# EAGLE board biofeedback (EAGLE 6.0), part 1 of 2
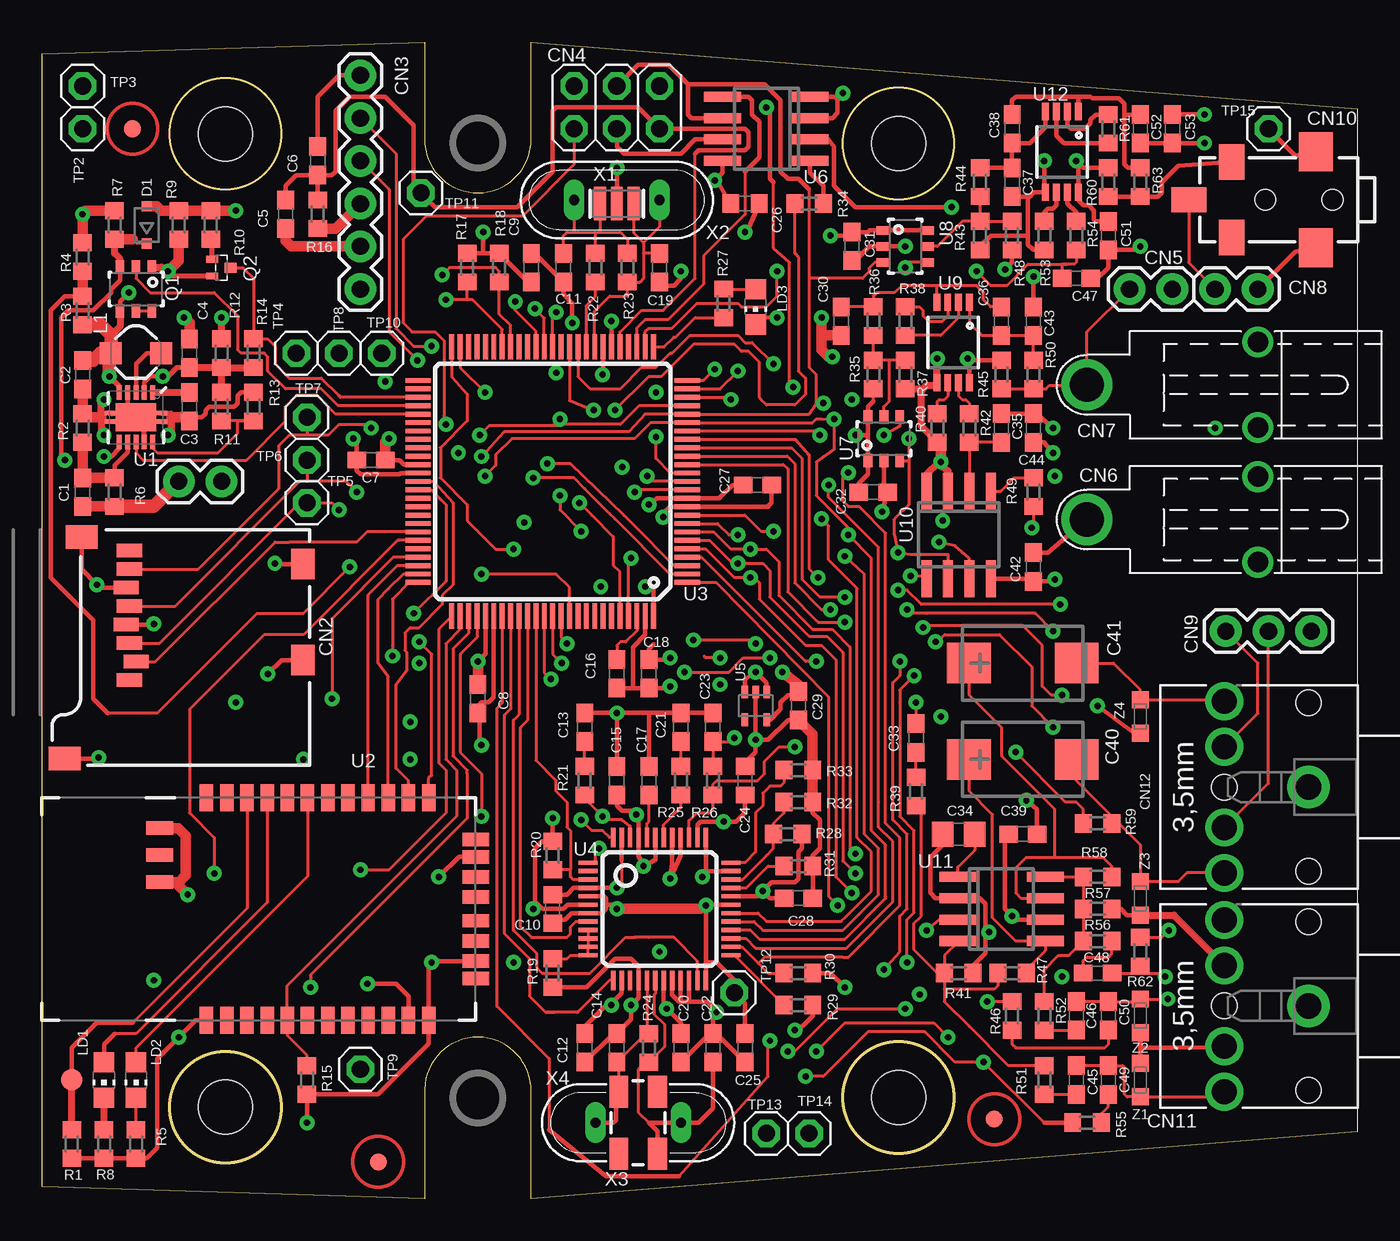
[diagram p0: board, top side]
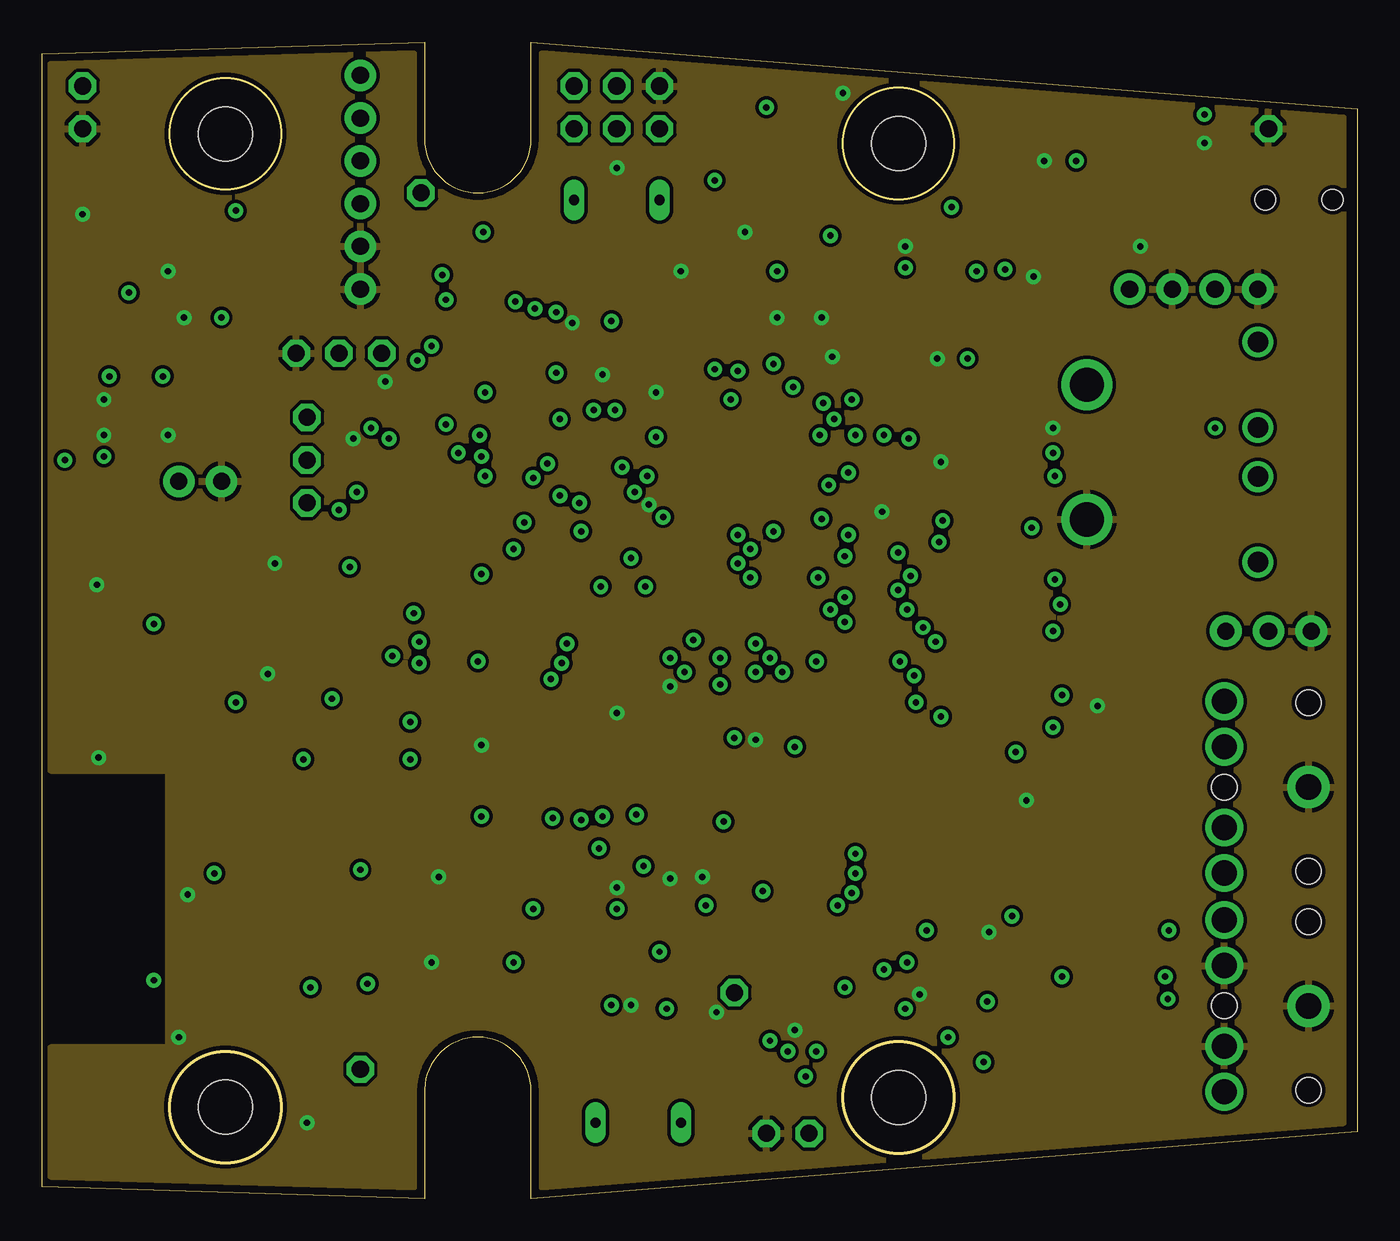
[diagram p1: board, inner layer GND]
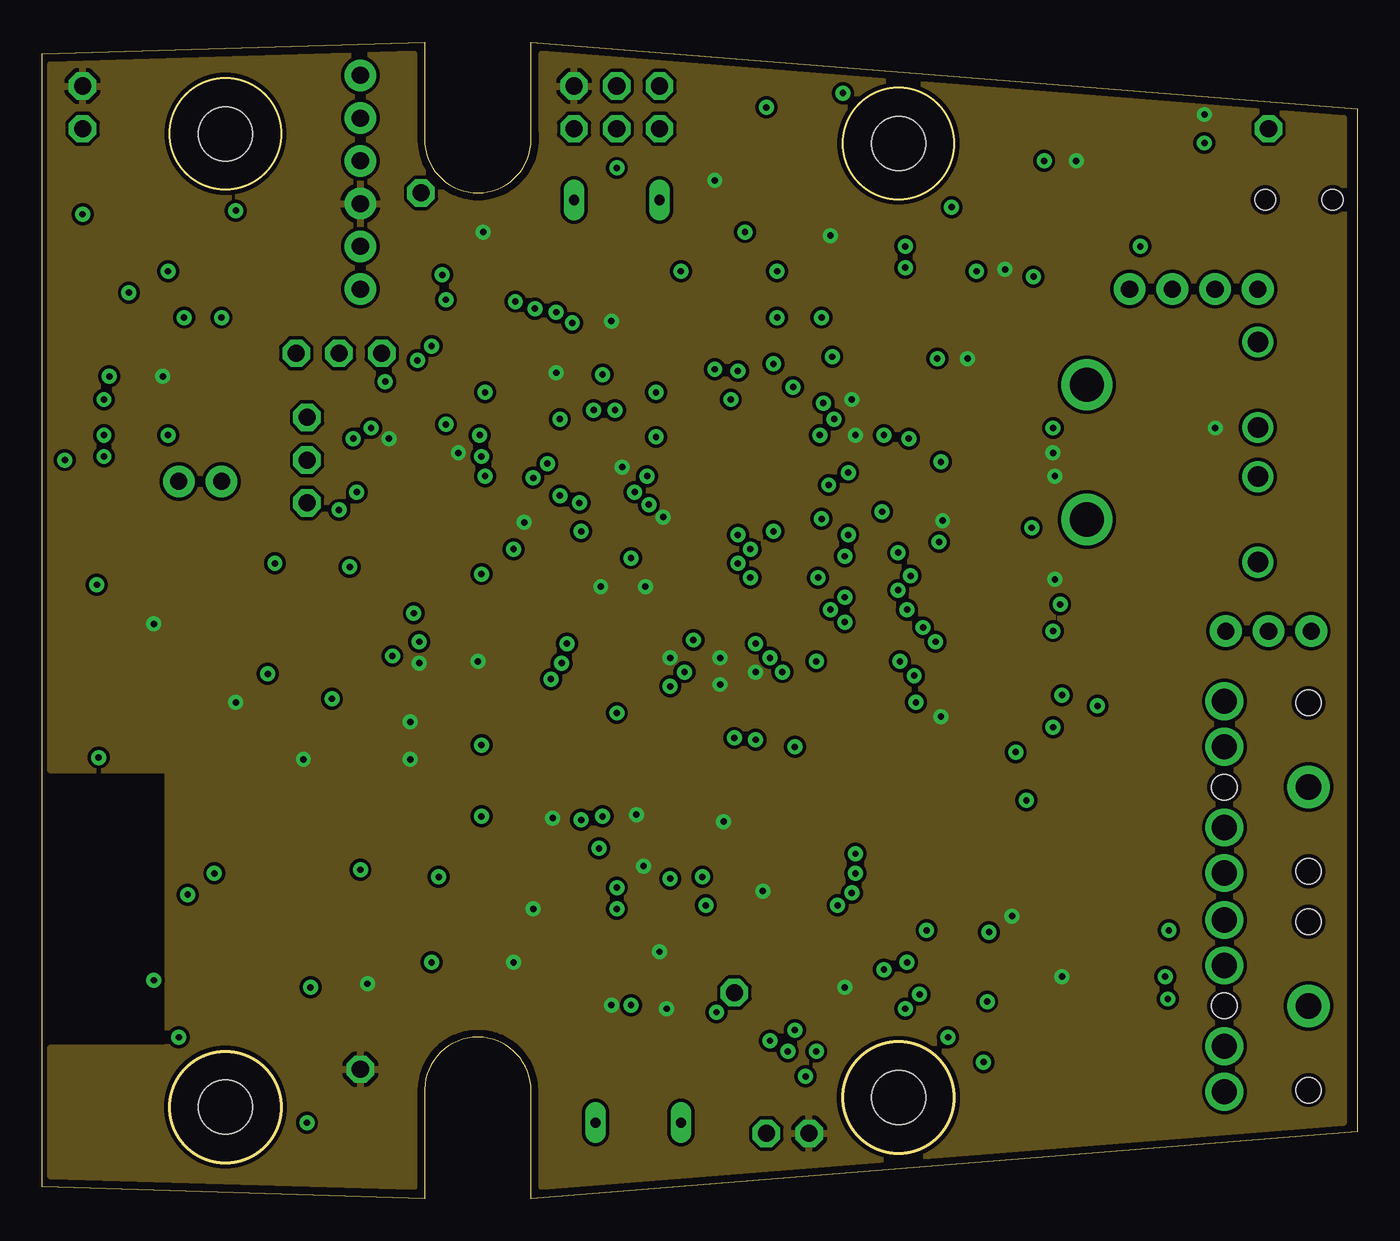
[diagram p2: board, inner layer VCC]
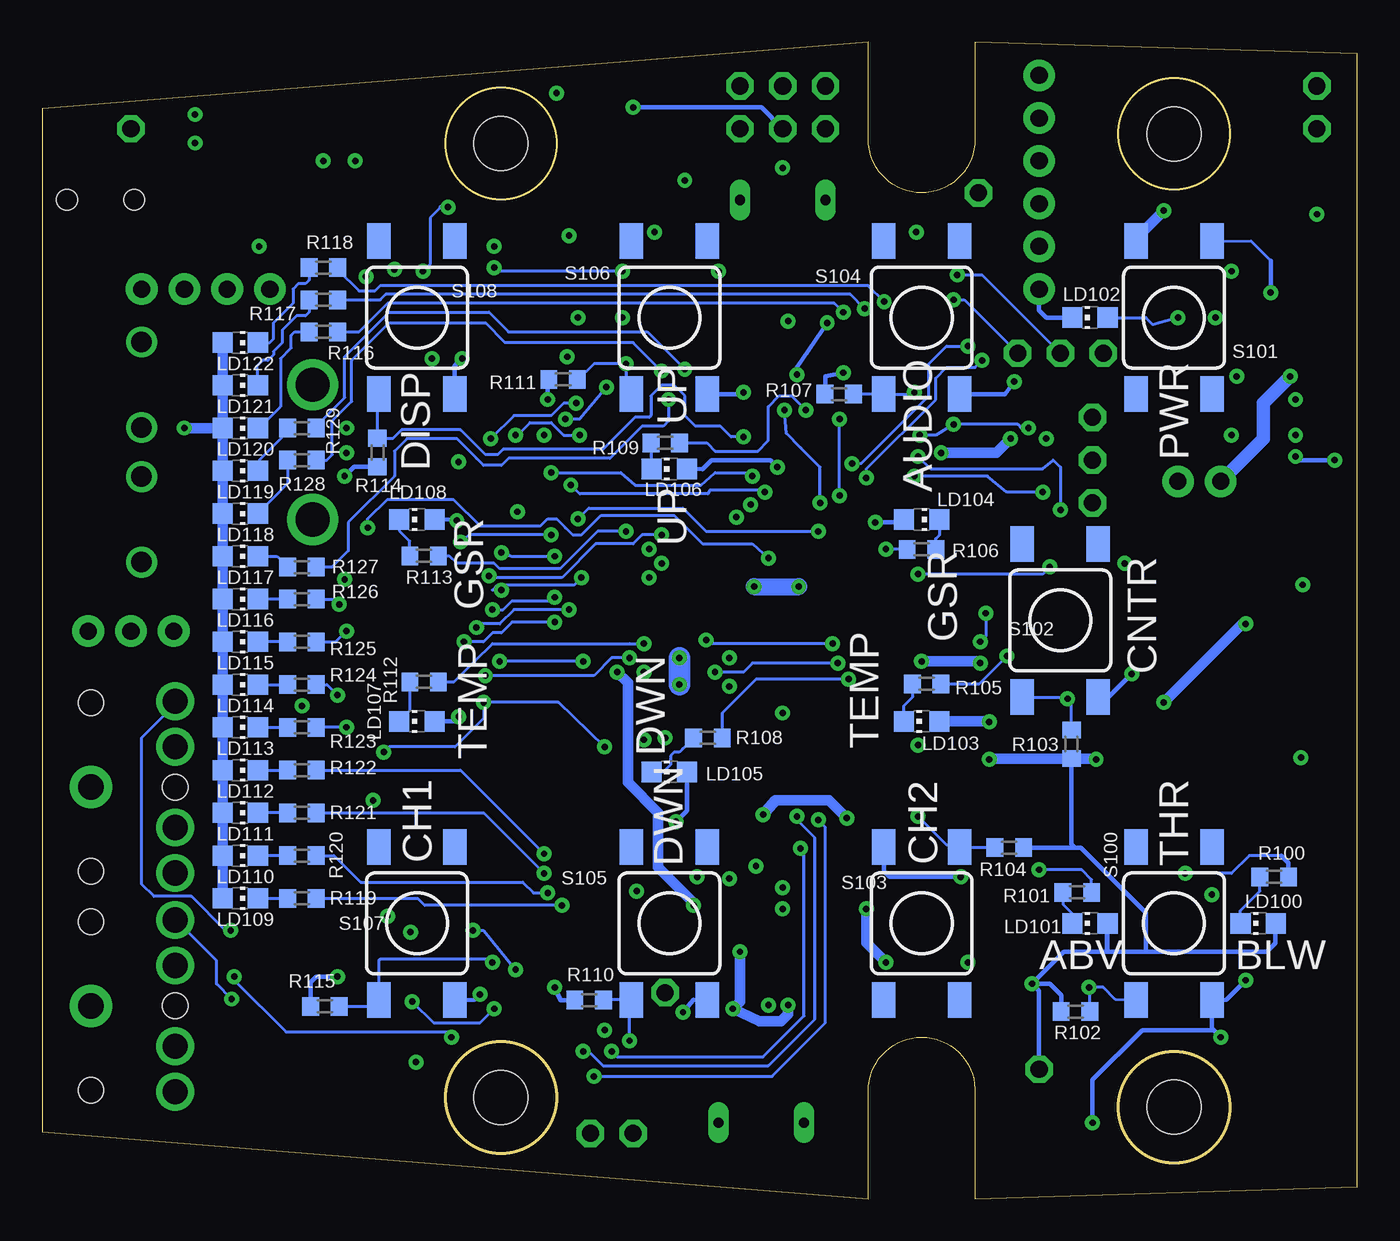
[diagram p3: board, bottom side, seen from below]

Size 78.18 x 68.73 mm. Coordinates in mm from the lower left corner, seen from the top.
Outline: 0,68.02 22.73,68.73 22.73,62.95 arc90 25.91,59.77 arc90 29.06,62.95 29.06,68.73 78.18,64.75 78.18,3.97 29.06,0 29.06,6.43 arc90 25.91,9.61 arc94 22.73,6.22 22.73,0 0,0.71 0,68.02
Outline: circle at 10.9,5.45 radius 3.3
Outline: circle at 50.9,6.03 radius 3.3
Outline: circle at 10.9,63.28 radius 3.3
Outline: circle at 50.9,62.71 radius 3.3
Copper layers (1+2*15+16): Top 0.035mm / dielectric 0.2mm / GND 0.035mm / dielectric 0.15mm / VCC 0.035mm / dielectric 0.2mm / Bottom 0.035mm
Design rules: minimum track width 7mil, minimum drill 15mil, track to track 8mil, track to pad 7mil, pad to pad 8mil, via to via 8mil, smd to smd 8mil, copper to edge 10mil, drill to drill 8mil, minimum pad ring 12mil, minimum via ring 10mil, stop-mask expansion 3mil, vias tented up to drill 25mil, thermal gap 10mil
Net classes: 0 default: width 0.178 mm; 1 power: width 0.254 mm; 2 VIN: width 0.406 mm; 3 3.3V: width 0.254 mm; 4 1.8V: width 0.254 mm
Holes 3.2 mm at 50.9,62.71 10.9,63.28 50.9,6.03 10.9,5.45

## Footprints (pad centres in the part's own frame; a part is rotated, then mirrored left to right if it is on the bottom)
C0603 = smd 1.1 x 1: 1 -0.85,0; 2 0.85,0
C0603' = smd 1 x 1.1: 1 -0.85,0; 2 0.85,0
C0805 = smd 1.3 x 1.5: 1 -0.95,0; 2 0.95,0
CT7343 = smd 2.6 x 2.4: + -3.2,0; - 3.2,0
1X02 = drill 1.016 pad 1.88: 1 0,0; 2 2.54,0
MICRO-SD-SOCKET-PP = smd 0.8 x 1.5: 1 -8.94,10.7; 2 -7.84,10.3; 3 -6.74,10.7; 4 -5.64,10.9; 5 -4.54,10.7; 6 -3.44,10.9; 7 -2.34,10.7; 8 -1.24,10.7 | smd 1.8 x 1.4: CD1 -2.05,0.4; CD2 -7.75,0.4 | smd 1.4 x 1.9: GND1 -13.6,14.55; GND3 -0.45,13.55
1X06 = drill 1.016 pad 1.88: 1 0,0; 2 2.54,0; 3 5.08,0; 4 7.62,0; 5 10.16,0; 6 12.7,0
2X03 = drill 1.016 octagon: 1 -2.54,-1.27; 2 -2.54,1.27; 3 0,-1.27; 4 0,1.27; 5 2.54,-1.27; 6 2.54,1.27
TOUCHPROOF1.1MM = drill 2.032: P$1 -10.16,0 | drill 1.219: P$2 0,2.54; P$3 0,-2.54
1X03 = drill 1.016 pad 1.88: 1 0,0; 2 2.54,0; 3 5.08,0
STEREOJACK2.5MM_SMD = smd 1.5 x 2.1: 1 6,2.25; 4 6,-2.25 | smd 2.1 x 1.5: 3 8.55,0 | smd 2 x 2.3: 5 1,2.85; A 1,-2.85 | hole 1.219: 0,0; 4,0
STX3100 = drill 1.5 pad 2.54: 1 2.7,-0.1 | drill 1.5: 2 7.7,5; 3 7.7,2.3; 4 7.7,-2.5; 5 7.7,-5.2 | hole 1.5: 2.7,4.9; 2.7,-5.1; 7.7,-0.1
SOD323-R = smd 0.6 x 0.6: A 1.1,0; C -1.1,0
CDRH2D09 = smd 1.3 x 1.3: P$1 -1.5,0; P$2 1.5,0
CHIP-LED0805 = smd 1.2 x 1.2: A 0,-1.05; C 0,1.05
FIDUCIA-MOUNT = smd 1.016 x 1.016: P$1 0,0
SOT-23-6 = smd 0.51 x 0.8: 1 -0.95,-1.3; 2 0,-1.3; 3 0.95,-1.3; 4 0.95,1.3; 5 0,1.3; 6 -0.95,1.3
EMT3 = smd 0.4 x 0.7: B -0.5,-0.55; E 0.5,-0.55 | smd 0.6 x 0.7: C 0,0.55
R0603 = smd 1 x 1.1: 1 -0.85,0; 2 0.85,0
TACTILE_SWITCH_SMD_6MM_SQ = smd 2.1 x 1.4: 1 -4.55,2.25; 2 4.55,2.25; 3 -4.55,-2.25; 4 4.55,-2.25
PAD.03X.05 = smd 1.27 x 1.27: P$1 0,0
1X01 = drill 1.016 octagon: 1 0,0
QFN-10_PAD = smd 0.297 x 0.85: 1 -1,-1.475; 2 -0.5,-1.475; 3 0,-1.475; 4 0.5,-1.475; 5 1,-1.475; 6 1,1.475; 7 0.5,1.475; 8 0,1.475; 9 -0.5,1.475; 10 -1,1.475 | smd 0.7 x 0.28: 11 -1.5,0.25; 12 -1.5,-0.25; 13 1.5,0.25; 14 1.5,-0.25 | smd 2.4 x 1.65: 15 0,0
RN41 = smd 0.8 x 1.6: 1 -6.6,-6.6; 2 -5.4,-6.6; 3 -4.2,-6.6; 4 -3,-6.6; 5 -1.8,-6.6; 6 -0.6,-6.6; 7 0.6,-6.6; 8 1.8,-6.6; 9 3,-6.6; 10 4.2,-6.6; 11 5.4,-6.6; 12 6.6,-6.6; 13 6.6,6.6; 14 5.4,6.6; 15 4.2,6.6; 16 3,6.6; 17 1.8,6.6; 18 0.6,6.6; 19 -0.6,6.6; 20 -1.8,6.6; 21 -3,6.6; 22 -4.2,6.6; 23 -5.4,6.6; 24 -6.6,6.6 | smd 1.6 x 0.8: 25 -9.4,4.8; 26 -9.4,3.2; 27 -9.4,1.6; 28 9.4,3.1; 29 9.4,-3.1; 30 9.4,-4.122; 31 9.4,-1.9; 32 9.4,-0.7; 33 9.4,0.7; 34 9.4,1.9; 35 9.4,4.122
TQFP100 = smd 1.5 x 0.29: 1 -8,6; 2 -8,5.5; 3 -8,5; 4 -8,4.5; 5 -8,4; 6 -8,3.5; 7 -8,3; 8 -8,2.5; 9 -8,2; 10 -8,1.5; 11 -8,1; 12 -8,0.5; 13 -8,0; 14 -8,-0.5; 15 -8,-1; 16 -8,-1.5; 17 -8,-2; 18 -8,-2.5; 19 -8,-3; 20 -8,-3.5; 21 -8,-4; 22 -8,-4.5; 23 -8,-5; 24 -8,-5.5; 25 -8,-6; 51 8,-6; 52 8,-5.5; 53 8,-5; 54 8,-4.5; 55 8,-4; 56 8,-3.5; 57 8,-3; 58 8,-2.5; 59 8,-2; 60 8,-1.5; 61 8,-1; 62 8,-0.5; 63 8,0; 64 8,0.5; 65 8,1; 66 8,1.5; 67 8,2; 68 8,2.5; 69 8,3; 70 8,3.5; 71 8,4; 72 8,4.5; 73 8,5; 74 8,5.5; 75 8,6 | smd 0.29 x 1.5: 26 -6,-8; 27 -5.5,-8; 28 -5,-8; 29 -4.5,-8; 30 -4,-8; 31 -3.5,-8; 32 -3,-8; 33 -2.5,-8; 34 -2,-8; 35 -1.5,-8; 36 -1,-8; 37 -0.5,-8; 38 0,-8; 39 0.5,-8; 40 1,-8; 41 1.5,-8; 42 2,-8; 43 2.5,-8; 44 3,-8; 45 3.5,-8; 46 4,-8; 47 4.5,-8; 48 5,-8; 49 5.5,-8; 50 6,-8; 76 6,8; 77 5.5,8; 78 5,8; 79 4.5,8; 80 4,8; 81 3.5,8; 82 3,8; 83 2.5,8; 84 2,8; 85 1.5,8; 86 1,8; 87 0.5,8; 88 0,8; 89 -0.5,8; 90 -1,8; 91 -1.5,8; 92 -2,8; 93 -2.5,8; 94 -3,8; 95 -3.5,8; 96 -4,8; 97 -4.5,8; 98 -5,8; 99 -5.5,8; 100 -6,8
LQFP-48 = smd 0.254 x 1.143: 1 -2.75,-4.25; 2 -2.25,-4.25; 3 -1.75,-4.25; 4 -1.25,-4.25; 5 -0.75,-4.25; 6 -0.25,-4.25; 7 0.25,-4.25; 8 0.75,-4.25; 9 1.25,-4.25; 10 1.75,-4.25; 11 2.25,-4.25; 12 2.75,-4.25; 25 2.75,4.25; 26 2.25,4.25; 27 1.75,4.25; 28 1.25,4.25; 29 0.75,4.25; 30 0.25,4.25; 31 -0.25,4.25; 32 -0.75,4.25; 33 -1.25,4.25; 34 -1.75,4.25; 35 -2.25,4.25; 36 -2.75,4.25 | smd 1.143 x 0.254: 13 4.25,-2.75; 14 4.25,-2.25; 15 4.25,-1.75; 16 4.25,-1.25; 17 4.25,-0.75; 18 4.25,-0.25; 19 4.25,0.25; 20 4.25,0.75; 21 4.25,1.25; 22 4.25,1.75; 23 4.25,2.25; 24 4.25,2.75; 37 -4.25,2.75; 38 -4.25,2.25; 39 -4.25,1.75; 40 -4.25,1.25; 41 -4.25,0.75; 42 -4.25,0.25; 43 -4.25,-0.25; 44 -4.25,-0.75; 45 -4.25,-1.25; 46 -4.25,-1.75; 47 -4.25,-2.25; 48 -4.25,-2.75
SC70 = smd 0.4 x 0.75: 1 -0.65,-0.825; 2 0,-0.825; 3 0.65,-0.825; 4 0.65,0.825; 5 -0.65,0.825
SO-08 = smd 0.6 x 2.2: 1 -1.905,-2.6; 2 -0.635,-2.6; 3 0.635,-2.6; 4 1.905,-2.6; 5 1.905,2.6; 6 0.635,2.6; 7 -0.635,2.6; 8 -1.905,2.6
MSOP-8 = smd 0.41 x 1.02: 1 -0.975,-2.4; 2 -0.325,-2.4; 3 0.325,-2.4; 4 0.975,-2.4; 5 0.975,2.4; 6 0.325,2.4; 7 -0.325,2.4; 8 -0.975,2.4
RESONATOR = smd 0.7 x 2: 1 -1,0; 2 0,0; 3 1,0
QS = drill 0.61 long: 1 -2.54,0; 2 2.54,0
CRYSTAL-SMD-5X3 = smd 1.9 x 1.1: 1 -1.85,-1.15; 2 1.85,-1.15; 3 1.85,1.15; 4 -1.85,1.15
QS_COMBO = drill 0.61 long: 1 -2.54,0; 2 2.54,0
CT/CN0603 = smd 1 x 1: 1 -1,0; 2 1,0

## Placement (x,y rotation side)
C1  0.1uF  [C0603]  2.41,41.99 90 top
C2  10uF  [C0603]  2.41,48.98 270 top
C3  0.1uF  [C0603]  8.76,47.07 270 top
C4  22uF  [C0603]  8.76,50.25 90 top
C5  22pF  [C0603]  14.47,58.5 270 top
C6  0.1uF  [C0603]  16.38,61.68 270 top
C7  0.1uF  [C0603]  19.55,43.9 0 top
C8  0.1uF  [C0603]  25.9,29.71 90 top
C9  0.1uF  [C0603]  29.08,55.33 270 top
C10  0.1uF  [C0603']  30.35,17.23 90 top
C11  22pF  [C0603]  30.98,55.33 90 top
C12  0.1uF  [C0603]  32.25,8.97 270 top
C13  10nF  [C0603]  32.25,28.02 90 top
C14  22pF  [C0603]  34.16,8.97 270 top
C15  10uF  [C0603]  34.16,24.84 90 top
C16  0.1uF  [C0603]  34.16,31.2 90 top
C17  1.0uF  [C0603]  36.06,24.84 270 top
C18  0.1uF  [C0603]  36.06,31.2 90 top
C19  22pF  [C0603]  36.7,55.33 90 top
C20  0.1uF  [C0603]  37.97,8.97 270 top
C21  47nF  [C0603]  37.97,28.02 90 top
C22  22pF  [C0603]  39.88,8.97 270 top
C23  10nF  [C0603]  39.88,28.02 90 top
C24  0.1uF  [C0603']  41.78,24.84 90 top
C25  0.1uF  [C0603]  41.78,8.97 270 top
C26  0.1uF  [C0603']  41.78,59.13 0 top
C27  0.1uF  [C0603]  42.52,42.41 0 top
C28  0.1uF  [C0603]  44.95,17.86 0 top
C29  10uF  [C0603]  44.95,29.29 270 top
C30  33pF  [C0603]  47.49,52.15 90 top
C31  0.1uF  [C0603]  48.13,56.59 270 top
C32  0.1uF  [C0603]  49.4,41.99 0 top
C33  0.1uF  [C0603]  51.94,27.39 270 top
C34  1.0uF  [C0805]  54.48,21.67 180 top
C35  1.0nF  [C0603]  57.02,45.8 90 top
C36  1.0nF  [C0603]  57.02,52.15 90 top
C37  33pF  [C0603]  57.65,60.41 90 top
C38  1.0nF  [C0603]  57.65,63.58 270 top
C39  10uF  [C0603]  58.29,21.67 0 top
C40  68uF  [CT7343]  58.29,26.12 0 top
C41  68uF  [CT7343]  58.29,31.83 0 top
C42  0.1uF  [C0603]  58.93,37.55 90 top
C43  33pF  [C0603]  58.93,52.15 90 top
C44  0.1uF  [C0603]  58.93,45.8 90 top
C45  0.1uF  [C0603]  61.46,7.06 270 top
C46  0.1uF  [C0603]  61.46,10.88 270 top
C47  1.0nF  [C0603]  61.46,54.69 0 top
C48  0.1uF  [C0603]  62.73,13.42 180 top
C49  1.0uF  [C0603]  63.37,7.06 270 top
C50  1.0uF  [C0603]  63.37,10.88 270 top
C51  0.1uF  [C0603]  63.37,57.23 270 top
C52  33pF  [C0603]  65.28,63.58 270 top
C53  10uF  [C0603]  67.18,63.58 270 top
CN1  CONN HEADER PH TOP 2POS 2MM  [1X02]  8.13,42.62 0 top
CN2  USD-SOCKETNEW  [MICRO-SD-SOCKET-PP]  15.9,39.76 90 top
CN3  NSTUFF  [1X06]  18.92,66.75 270 top
CN4  ICSP  [2X03]  34.16,64.85 0 top
CN5  CONN HEADER PH TOP 2POS 2MM  [1X02]  64.64,54.05 0 top
CN6  TOUCHPROOF  [TOUCHPROOF1.1MM]  72.26,40.37 0 top
CN7  TOUCHPROOF  [TOUCHPROOF1.1MM]  72.26,48.37 0 top
CN8  CONN HEADER PH TOP 2POS 2MM  [1X02]  72.26,54.05 180 top
CN9  Internal Speaker  [1X03]  75.44,33.73 180 top
CN10  2.5mm(1/4") Mono  [STEREOJACK2.5MM_SMD]  76.71,59.37 180 top
CN11  AUDIO IN  [STX3100]  77.98,11.37 180 top
CN12  AUDIO OUT  [STX3100]  77.98,24.37 180 top
D1  1N4148WX-TP  [SOD323-R]  6.22,57.87 90 top
L1  4.7uH, 1.2A  [CDRH2D09]  5.58,50.25 180 top
LD1  GREEN  [CHIP-LED0805]  3.68,7.06 180 top
LD2  GREEN  [CHIP-LED0805]  5.58,7.06 180 top
LD3  YELLOW  [CHIP-LED0805]  42.41,53 180 top
LD100  GREEN  [CHIP-LED0805]  5.9,16.37 90 bottom
LD101  GREEN  [CHIP-LED0805]  15.9,16.37 90 bottom
LD102  GREEN  [CHIP-LED0805]  15.9,52.37 90 bottom
LD103  GREEN  [CHIP-LED0805]  25.9,28.37 90 bottom
LD104  GREEN  [CHIP-LED0805]  25.9,40.37 270 bottom
LD105  GREEN  [CHIP-LED0805]  40.9,25.37 90 bottom
LD106  GREEN  [CHIP-LED0805]  40.9,43.37 90 bottom
LD107  GREEN  [CHIP-LED0805]  55.9,28.37 90 bottom
LD108  GREEN  [CHIP-LED0805]  55.9,40.37 90 bottom
LD109  GREEN  [CHIP-LED0805]  66.4,17.85 270 bottom
LD110  GREEN  [CHIP-LED0805]  66.4,20.4 270 bottom
LD111  GREEN  [CHIP-LED0805]  66.4,22.94 270 bottom
LD112  GREEN  [CHIP-LED0805]  66.4,25.48 270 bottom
LD113  GREEN  [CHIP-LED0805]  66.4,28.02 270 bottom
LD114  GREEN  [CHIP-LED0805]  66.4,30.55 270 bottom
LD115  GREEN  [CHIP-LED0805]  66.4,33.09 270 bottom
LD116  GREEN  [CHIP-LED0805]  66.4,35.64 270 bottom
LD117  GREEN  [CHIP-LED0805]  66.4,38.18 270 bottom
LD118  GREEN  [CHIP-LED0805]  66.4,40.72 270 bottom
LD119  GREEN  [CHIP-LED0805]  66.4,43.26 270 bottom
LD120  GREEN  [CHIP-LED0805]  66.4,45.8 270 bottom
LD121  GREEN  [CHIP-LED0805]  66.4,48.34 270 bottom
LD122  GREEN  [CHIP-LED0805]  66.4,50.88 270 bottom
MN1  FIDUCIALMOUNT  [FIDUCIA-MOUNT]  5.37,63.58 0 top
MN2  FIDUCIALMOUNT  [FIDUCIA-MOUNT]  19.98,2.2 0 top
MN3  FIDUCIALMOUNT  [FIDUCIA-MOUNT]  56.6,4.74 0 top
Q1  NPN PNP 4.7K  [SOT-23-6]  5.58,54.05 180 top
Q2  2SC4726TL  [EMT3]  10.67,55.33 270 top
R1  10K  [R0603]  1.78,3.26 90 top
R2  220k  [R0603]  2.41,45.8 270 top
R3  220k  [R0603]  2.41,52.79 270 top
R4  220k  [R0603]  2.41,55.96 270 top
R5  470R  [R0603]  3.68,3.26 270 top
R6  2M  [R0603]  4.31,41.99 270 top
R7  220k  [R0603]  4.31,57.87 270 top
R8  470R  [R0603]  5.58,3.26 270 top
R9  220k  [R0603]  8.13,57.87 90 top
R10  2K  [R0603]  10.03,57.87 270 top
R11  1.2M  [R0603]  10.67,47.07 90 top
R12  470R  [R0603]  10.67,50.25 270 top
R13  220k  [R0603]  12.57,47.07 270 top
R14  220k  [R0603]  12.57,50.25 270 top
R15  100K  [R0603]  15.74,7.06 270 top
R16  10K  [R0603]  16.38,58.5 90 top
R17  100K  [R0603]  25.27,55.33 270 top
R18  100K  [R0603]  27.17,55.33 270 top
R19  100K  [R0603]  30.35,13.42 90 top
R20  100K  [R0603]  30.35,20.4 270 top
R21  20R  [R0603]  32.25,24.84 270 top
R22  27R  [R0603]  32.89,55.33 90 top
R23  1M  [R0603]  34.8,55.33 270 top
R24  1M  [R0603]  36.06,8.97 270 top
R25  10R  [R0603]  37.97,24.84 270 top
R26  20R  [R0603]  39.88,24.84 270 top
R27  1.0K  [R0603]  40.51,53.21 270 top
R28  100K  [R0603]  44.32,21.67 180 top
R29  100K  [R0603]  44.95,11.51 180 top
R30  100K  [R0603]  44.95,13.42 0 top
R31  100K  [R0603]  44.95,19.77 180 top
R32  100K  [R0603]  44.95,23.58 180 top
R33  100K  [R0603]  44.95,25.48 180 top
R34  1.0K  [R0603]  45.59,59.13 0 top
R35  1.0M  [R0603]  49.4,48.98 270 top
R36  100K  [R0603]  49.4,52.15 270 top
R37  1.0M  [R0603]  51.3,48.98 90 top
R38  49.9K  [R0603]  51.3,52.15 270 top
R39  100K  [R0603]  51.94,24.21 90 top
R40  0R0  [R0603]  53.21,45.8 90 top
R41  100K  [R0603]  54.48,13.42 0 top
R42  100K  [R0603]  55.12,45.8 270 top
R43  1.0M  [R0603]  55.75,57.23 90 top
R44  100K  [R0603]  55.75,60.41 270 top
R45  10M  [R0603]  57.02,48.98 90 top
R46  470R  [R0603]  57.65,10.88 90 top
R47  100K  [R0603]  57.65,13.42 180 top
R48  1.0M  [R0603]  57.65,57.23 270 top
R49  1.0K  [R0603]  58.93,41.99 90 top
R50  100K  [R0603]  58.93,48.98 90 top
R51  100K  [R0603]  59.56,7.06 270 top
R52  100K  [R0603]  59.56,10.88 270 top
R53  0R0  [R0603]  59.56,57.23 90 top
R54  100K  [R0603]  61.46,57.23 270 top
R55  470R  [R0603]  62.1,4.53 180 top
R56  100K  [R0603]  62.73,15.32 0 top
R57  100K  [R0603]  62.73,17.23 0 top
R58  100K  [R0603]  62.73,19.13 180 top
R59  0R0  [R0603]  62.73,22.3 180 top
R60  10K  [R0603]  63.37,60.41 270 top
R61  49.9K  [R0603]  63.37,63.58 90 top
R62  0R0  [R0603]  65.28,14.69 270 top
R63  100K  [R0603]  65.28,60.41 90 top
R100  470R  [R0603]  4.95,19.13 0 bottom
R101  470R  [R0603]  16.65,18.2 0 bottom
R102  100K  [R0603]  16.76,11.13 0 bottom
R103  100K  [R0603]  16.99,27.01 90 bottom
R104  100K  [R0603]  20.69,20.87 180 bottom
R105  470R  [R0603]  25.6,30.6 0 bottom
R106  470R  [R0603]  25.91,38.59 180 bottom
R107  100K  [R0603]  30.81,47.81 0 bottom
R108  470R  [R0603]  38.6,27.39 0 bottom
R109  470R  [R0603]  41.14,44.91 0 bottom
R110  100K  [R0603]  45.67,11.81 0 bottom
R111  100K  [R0603]  47.22,48.7 0 bottom
R112  470R  [R0603]  55.48,30.71 0 bottom
R113  470R  [R0603]  55.48,38.21 0 bottom
R114  100K  [R0603]  58.24,44.34 90 bottom
R115  100K  [R0603]  61.37,11.43 0 bottom
R116  470R  [R0603]  61.46,51.52 0 bottom
R117  470R  [R0603]  61.46,53.42 0 bottom
R118  470R  [R0603]  61.46,55.33 0 bottom
R119  470R  [R0603]  62.73,17.85 0 bottom
R120  470R  [R0603]  62.73,20.4 0 bottom
R121  470R  [R0603]  62.73,22.94 0 bottom
R122  470R  [R0603]  62.73,25.48 0 bottom
R123  470R  [R0603]  62.73,28.02 0 bottom
R124  470R  [R0603]  62.73,30.55 0 bottom
R125  470R  [R0603]  62.73,33.09 0 bottom
R126  470R  [R0603]  62.73,35.64 0 bottom
R127  470R  [R0603]  62.73,37.54 0 bottom
R128  470R  [R0603]  62.73,43.89 0 bottom
R129  470R  [R0603]  62.73,45.8 0 bottom
S100  SPST-NO  [TACTILE_SWITCH_SMD_6MM_SQ]  10.9,16.37 270 bottom
S101  SPST-NO  [TACTILE_SWITCH_SMD_6MM_SQ]  10.9,52.37 90 bottom
S102  SPST-NO  [TACTILE_SWITCH_SMD_6MM_SQ]  17.67,34.37 270 bottom
S103  SPST-NO  [TACTILE_SWITCH_SMD_6MM_SQ]  25.9,16.37 90 bottom
S104  SPST-NO  [TACTILE_SWITCH_SMD_6MM_SQ]  25.9,52.37 270 bottom
S105  SPST-NO  [TACTILE_SWITCH_SMD_6MM_SQ]  40.9,16.37 270 bottom
S106  SPST-NO  [TACTILE_SWITCH_SMD_6MM_SQ]  40.9,52.37 270 bottom
S107  SPST-NO  [TACTILE_SWITCH_SMD_6MM_SQ]  55.9,16.37 270 bottom
S108  SPST-NO  [TACTILE_SWITCH_SMD_6MM_SQ]  55.9,52.37 270 bottom
TP1  [PAD.03X.05]  1.78,7.06 0 top
TP2  NSTUFF  [1X01]  2.41,63.58 0 top
TP3  NSTUFF  [1X01]  2.41,66.12 0 top
TP4  NSTUFF  [1X01]  15.11,50.25 0 top
TP5  NSTUFF  [1X01]  15.74,41.36 0 top
TP6  NSTUFF  [1X01]  15.74,43.9 0 top
TP7  NSTUFF  [1X01]  15.74,46.43 0 top
TP8  NSTUFF  [1X01]  17.65,50.25 0 top
TP9  NSTUFF  [1X01]  18.92,7.7 180 top
TP10  NSTUFF  [1X01]  20.19,50.25 0 top
TP11  NSTUFF  [1X01]  22.52,59.77 0 top
TP12  NSTUFF  [1X01]  41.14,12.25 0 top
TP13  NSTUFF  [1X01]  43.05,3.89 0 top
TP14  NSTUFF  [1X01]  45.59,3.89 0 top
TP15  NSTUFF  [1X01]  72.9,63.58 0 top
U1  TPS61200  [QFN-10_PAD]  5.58,46.44 180 top
U2  BLUETOOTH-RN41  [RN41]  16.38,17.23 0 top
U3  ATMEGA2560AU  [TQFP100]  30.35,42.62 180 top
U4  VS1053  [LQFP-48]  36.7,17.23 270 top
U5  1.8V  [SC70]  42.41,29.29 180 top
U6  MCP6S21-I/SN  [SO-08]  43.05,63.58 90 top
U7  MCP4013  [SOT-23-6]  50.04,45.16 0 top
U8  MCP4013  [SOT-23-6]  51.3,56.59 270 top
U9  INA826  [MSOP-8]  54.15,50.88 180 top
U10  MCP6S21-I/SN  [SO-08]  54.48,39.45 180 top
U11  TPA6100  [SO-08]  57.02,17.23 270 top
U12  INA826  [MSOP-8]  60.62,62.2 180 top
X1  16MHz  [RESONATOR]  34.16,59.13 180 top
X2  16MHz  [QS]  34.16,59.35 180 top
X3  12.288MHz  [CRYSTAL-SMD-5X3]  35.43,4.53 270 top
X4  16MHz  [QS_COMBO]  35.43,4.53 0 top
Z1  PGB1010603  [CT/CN0603]  65.28,7.06 90 top
Z2  PGB1010603  [CT/CN0603]  65.28,10.88 270 top
Z3  PGB1010603  [CT/CN0603]  65.28,17.86 270 top
Z4  PGB1010603  [CT/CN0603]  65.28,28.66 270 top

## Library data of the parts
C1 C3 C7-C9 C12 C16 C18 C20 C25 C27 C28 C33 C44-C46 C48 = resistor; PARTNO: CC0603KRX7R7BB104
C2 C15 C29 C53 = resistor; PARTNO: C1608X5R1A106M
C4 = resistor; PARTNO: 250R14W224KV4T
C5 C14 C22 = resistor; PARTNO: GRM0335C1E220JD01D
C6 C31 C32 C42 C51 = resistor; DATABASE: ./BOM/PARTSDB.txt; PARTNO: CC0603KRX7R7BB104
C10 = mpf; DATABASE: ./BOM/PARTSDB.txt; PARTNO: CC0603KRX7R7BB104
C11 C19 = resistor; PARTNO: GRM0335C1E220JD01D; PLACE: POP IF X3
C13 C23 = resistor; PARTNO: CC0603KRX7R9BB103
C17 = resistor; PARTNO: GRM188R61A105KA61D
C21 = resistor; PARTNO: CC0603KRX7R8BB473
C24 C26 = mpf; PARTNO: CC0603KRX7R7BB104
C30 C43 = resistor; DNP: T; PARTNO: GRM0335C1E330JD01D
C34 = rcl; ESR: LOW ESR; PARTNO: ECP-U1C104MA5
C35 C36 = resistor; DNP: T; PARTNO: CC0603KRX7R9BB102
C37 C52 = resistor; DATABASE: ./BOM/PARTSDB.txt; DNP: T; PARTNO: GRM0335C1E330JD01D
C38 C47 = resistor; DATABASE: ./BOM/PARTSDB.txt; DNP: T; PARTNO: CC0603KRX7R9BB102
C39 = resistor; DATABASE: ./BOM/PARTSDB.txt; PARTNO: C1608X5R1A106M
C40 = rcl; DATABASE: ./BOM/PARTSDB.txt; ESR: LOW ESR; PARTNO: T491C686K006AT
C41 = rcl; ESR: LOW ESR; PARTNO: T491C686K006AT
C49 C50 = resistor; DATABASE: ./BOM/PARTSDB.txt; PARTNO: GRM188R61A105KA61D
CN1 CN5 CN8 = SparkFun; PARTNO: B2B-PH-K-S(LF)(SN)
CN2 = SparkFun; PARTNO: 101-00581-59
CN3 = SparkFun; PARTNO: 640456-6
CN4 = pinhead; PARTNO: 67996-406HLF
CN6 CN7 = mpf; PARTNO: 36619
CN9 = SparkFun; PARTNO: 640454-3
CN10 = mpf; PARTNO: MDSMT2ARATRX
CN11 = adafruit; PARTNO: SJ1-3555NG-BE
CN12 = adafruit; PARTNO: SJ1-3555NG-GR
D1 = diode; PARTNO: 1N4148WX-TP
L1 = SparkFun; PARTNO: CDRH2D09NP-4R7MC
LD1 LD2 = led; DATABASE: ./BOM/PARTSDB.txt; PARTNO: LG R971-KN-1-0-20-R18
LD3 = led; PARTNO: APT2012YC
LD100-LD122 = led; PARTNO: LG R971-KN-1-0-20-R18
MN1-MN3 = SmartPrj; BOM: EXCLUDE
Q1 = mpf; PARTNO: DMG264060R
Q2 = transistor-small-signal; PARTNO: MMBT3904TT1G
R1 R60 = resistor; DATABASE: ./BOM/PARTSDB.txt; PARTNO: RC0603JR-0710KL
R2 R7 R9 R13 R14 = resistor; PARTNO: RC0603JR-07220KL
R3 R4 = resistor; DATABASE: ./BOM/PARTSDB.txt; PARTNO: RC0603JR-07220KL
R5 R8 R46 R55 = resistor; DATABASE: ./BOM/PARTSDB.txt; PARTNO: RC0603JR-07470RL
R6 = resistor; PARTNO: RC0603JR-072ML
R10 = resistor; PARTNO: RC0603JR-072KL
R11 = resistor; PARTNO: CRCW04021M20FKED
R12 R100 R101 R105 R106 R108 R109 R112 R113 R116-R129 = resistor; PARTNO: RC0603JR-07470RL
R15 R20 R28 R30-R32 R36 R39 R41 R42 R47 R50-R52 R56-R58 R102-R104 R107 R110 R111 R114 R115 = resistor; PARTNO: RC0603JR-07100KL
R16 = resistor; PARTNO: RC0603JR-0710KL
R17-R19 R29 R33 R44 R54 R63 = resistor; DATABASE: ./BOM/PARTSDB.txt; PARTNO: RC0603JR-07100KL
R21 R26 = resistor; PARTNO: RC0603JR-0720RL
R22 = resistor; PARTNO: ERJ-3EKF27R0V
R23 R24 R35 R37 = resistor; PARTNO: RC0603JR-071ML
R25 = resistor; PARTNO: RC0603JR-0710RL
R27 R34 R49 = resistor; PARTNO: RC0603JR-071KL
R38 = resistor; PARTNO: ERJ-3EKF4992V
R40 = resistor; PARTNO: RC0603JR-070RL
R43 R48 = resistor; DATABASE: ./BOM/PARTSDB.txt; PARTNO: RC0603JR-071ML
R45 = resistor; PARTNO: RC0603JR-0710ML
R53 = resistor; DATABASE: ./BOM/PARTSDB.txt; PARTNO: RC0603JR-070RL
R59 R62 = resistor; DATABASE: ./BOM/PARTSDB.txt; DNP: T; PARTNO: RC0603JR-070RL
R61 = resistor; DATABASE: ./BOM/PARTSDB.txt; PARTNO: ERJ-3EKF4992V
S100-S108 = mpf; PARTNO: TL3301PF160QG
TP1 = SparkFun; DATABASE: ./BOM/PARTSDB.txt; DNP: T
TP2 TP4 TP15 = pinhead; DNP: T; SIGNAL: GND
TP3 = pinhead; DATABASE: ./BOM/PARTSDB.txt; DNP: T; SIGNAL: 3.3V
TP5 = pinhead; DATABASE: ./BOM/PARTSDB.txt; DNP: T; SIGNAL: MOSI
TP6 = pinhead; DATABASE: ./BOM/PARTSDB.txt; DNP: T; SIGNAL: SCK
TP7 = pinhead; DATABASE: ./BOM/PARTSDB.txt; DNP: T; SIGNAL: MISO
TP8 = pinhead; DATABASE: ./BOM/PARTSDB.txt; DNP: T; SIGNAL: SCL
TP9 TP14 = pinhead; DNP: T; SIGNAL: 3.3V
TP10 = pinhead; DATABASE: ./BOM/PARTSDB.txt; DNP: T; SIGNAL: SDA
TP11 = pinhead; DATABASE: ./BOM/PARTSDB.txt; DNP: T; SIGNAL: RESET
TP12 = pinhead; DNP: T; SIGNAL: 1.8V
TP13 = pinhead; DATABASE: ./BOM/PARTSDB.txt; DNP: T; SIGNAL: GND
U1 = SparkFun; PARTNO: TPS61200DRCT
U2 = ScratchPad; PARTNO: RN-42
U3 = mpf; PARTNO: ATMEGA2560-16AU
U4 = SparkFun; PARTNO: VS1053B-L
U5 = SparkFun; PARTNO: MIC5365-1.8YC5
U6 U10 = mpf; PARTNO: MCP6S21-I/SN
U7 = mpf; DATABASE: ./BOM/PARTSDB.txt; PARTNO: MCP4013T-103E/CH
U8 = mpf; PARTNO: MCP4013T-103E/CH
U9 U12 = mpf; PARTNO: INA826AIDGKR
U11 = mpf; PARTNO: TPA6100A2DR
X1 = SmartPrj; PARTNO: AWSCR-16.00CV-T; PLACE: POP X2 OR X3
X2 = special; PARTNO: ATS16B; PLACE: POP X2 OR X3
X3 = SparkFun; PARTNO: ATS122B
X4 = mpf; PARTNO: ATS16B
Z1-Z4 = varistor; PARTNO: PGB1010603MR

## Nets
1.8V [power]: C10.1 C25.1 C29.1 TP12.1 U4.5 U4.7 U4.24 U4.31 U5.5
3.3V: C4.1 C7.2 C8.2 C9.2 C12.1 C15.1 C18.2 C20.1 C24.1 C26.1 C27.2 C28.1 C31.1 C32.1 C39.1 C42.1 C44.1 C51.1 C53.1 CN2.4 CN3.4 CN4.2 LD100.A LD101.A LD103.A LD104.A LD105.A LD106.A LD107.A LD108.A LD109.A LD110.A LD111.A LD112.A LD113.A LD114.A LD115.A LD116.A LD117.A LD118.A LD119.A LD120.A LD121.A LD122.A R11.2 R12.2 R14.2 R16.1 R17.1 R18.1 R20.1 R28.1 R30.2 R35.2 R45.2 R48.2 R60.1 R102.1 R103.1 R104.1 R107.1 R110.1 R111.1 R114.1 R115.1 TP3.1 TP9.1 TP14.1 U1.2 U2.11 U3.10 U3.31 U3.61 U3.80 U3.100 U4.6 U4.14 U4.19 U4.32 U4.38 U4.43 U4.45 U5.1 U5.3 U6.8 U7.1 U7.6 U8.1 U8.6 U9.8 U10.8 U11.6 U12.8
AMP_SHTDWN: U3.4 U11.3
ANA_BATTERY: R3.1 R4.2 U3.90
ANA_GSR: R49.1 U3.97
ANA_TMP: R34.1 U3.96
ARDUINO_\RX0: CN3.3 U3.2
ARDUINO_DTR: C6.1 CN3.1
ARDUINO_TX0: CN3.2 U3.3
AREF: C16.2 U3.98
B_AUDIO: R107.2 S104.4 U3.49
B_CH1: R115.2 S107.4 U3.88
B_CH2: R104.2 S103.4 U3.79
B_CNTR: R103.2 S102.4 U3.72
B_DISP: R114.2 S108.4 U3.14
B_DWN: R110.2 S105.4 U3.82
B_ONOFF_SNS: Q2.C R14.1 U3.53
B_THR: R102.2 S100.4 U3.78
B_UP: R111.2 S106.4 U3.35
BT_\RTS: U2.15 U3.74
BT_CTS: U2.16 U3.73
BT_RST: R15.1 U2.5 U3.77
BT_RX: U2.13 U3.64
BT_TX: U2.14 U3.63
D1: LD1.C R5.1
D2: LD2.C R8.1
FB: R11.1 R13.2 U1.10
G2: LD107.C R112.1
GBUF: R25.2 U4.42
GND: C2.2 C3.2 C4.2 C5.2 C7.1 C8.1 C9.1 C10.2 C11.1 C12.2 C13.2 C14.1 C15.2 C16.1 C17.1 C18.1 C19.1 C20.2 C21.2 C22.1 C23.2 C24.2 C25.2 C26.2 C27.1 C28.2 C29.2 C30.1 C31.2 C32.2 C34.2 C35.2 C37.1 C39.2 C42.2 C43.2 C44.2 C47.2 C51.2 C52.2 C53.2 CN1.2 CN2.6 CN2.CD1 CN2.CD2 CN2.GND1 CN2.GND3 CN3.5 CN3.6 CN4.6 CN5.2 CN6.P$1 CN8.1 CN9.1 CN10.5 CN10.A CN11.1 CN11.3 CN11.4 CN12.1 LD3.C LD102.C Q1.1 Q2.E R1.1 R2.1 R4.1 R5.2 R7.1 R8.2 R9.1 R13.1 R15.2 R19.1 R29.1 R31.1 R32.1 R33.1 R37.1 R40.1 R41.2 R43.1 R53.1 R57.2 S100.2 S102.2 S103.2 S104.2 S105.2 S106.2 S107.2 S108.2 TP2.1 TP4.1 TP13.1 TP15.1 U1.4 U1.9 U1.11 U1.12 U1.13 U1.14 U1.15 U2.1 U2.12 U2.25 U2.27 U2.28 U2.29 U3.11 U3.32 U3.62 U3.81 U3.99 U4.4 U4.16 U4.20 U4.21 U4.22 U4.35 U4.37 U4.40 U4.41 U4.47 U5.2 U6.3 U6.4 U7.2 U8.2 U9.5 U10.3 U10.4 U11.2 U12.5 X1.2 Z1.2 Z2.2 Z3.2 Z4.2
GSR+: CN5.1 CN7.P$1 R45.1 R50.1
GSR_CS: U3.8 U10.5
GSROF_CS: U3.19 U7.4
LD17: R27.2 U3.26
LD_BAR01: R118.2 U3.40
LD_BAR02: R117.2 U3.39
LD_BAR03: R116.2 U3.38
LD_BAR04: R129.2 U3.25
LD_BAR05: R128.2 U3.24
LD_BAR06: R127.2 U3.23
LD_BAR07: R126.2 U3.18
LD_BAR08: R125.2 U3.17
LD_BAR09: R124.2 U3.16
LD_BAR10: R123.2 U3.15
LD_BAR11: R122.2 U3.7
LD_BAR12: R121.2 U3.6
LD_BAR13: R120.2 U3.5
LD_BAR14: R119.2 U3.1
LD_DWN: R108.2 U3.87
LD_GSR1: R113.2 U3.9
LD_GSR2: R106.2 U3.50
LD_THR_ABV: R100.2 U3.70
LD_THR_BLW: R101.2 U3.76
LD_TMP1: R112.2 U3.89
LD_TMP2: R105.2 U3.75
LD_UP: R109.2 U3.36
LEFTIN: C46.1 C50.1 CN11.5 Z2.1
LEFTOUT: C41.- CN12.5 R62.1 Z4.1
LEFTOUTSPKR: CN9.3 CN12.4
MIDI_RX: R30.1 U3.13 U4.26
MIDI_TX: U3.12 U4.27
MISO: CN2.7 CN4.1 TP7.1 U3.22 U4.30
MOSI: CN2.3 CN4.4 TP5.1 U3.21 U4.29 U6.6 U7.3 U8.3 U10.6
MP3_CS: U3.84 U4.23
MP3_DCS: U3.83 U4.13
MP3_DREQ: U3.85 U4.8
MP3_RST: R20.2 U3.86 U4.3
MP3GPIO0: R31.2 U4.33
MP3GPIO1: R28.2 R32.2 U4.34
MP3LEFTOUT: C48.1 R21.2 R62.2 U4.46
MP3LINEINLEFT: R46.2 U4.1
MP3LINEINRIGHT: R55.2 U4.48
MP3RCAP: C17.2 U4.44
MP3RIGHTOUT: C33.1 R26.2 R59.2 U4.39
N$2: R52.1 R56.1 R57.1 R58.2 U11.8
N$3: LD102.A R12.1
N$4: C21.1 R25.1
N$5: C13.1 R21.1
N$6: C46.2 R52.2
N$7: C23.1 R26.1
N$8: R39.1 R41.1 R47.2 R51.1 U11.4
N$10: C14.2 R24.1 U4.17 X3.1 X4.1
N$11: R38.2 U9.2
N$13: Q1.5 Q1.6
N$14: LD105.C R108.1
N$15: R38.1 U9.3
N$16: C30.2 C36.2 R36.1 U9.4
N$17: C36.1 C43.1 R50.2 U9.1
N$18: R42.1 U9.7
N$19: L1.P$1 U1.3
N$20: C3.1 U1.1
N$21: LD106.C R109.1
N$22: C35.1 R42.2 U10.2
N$23: LD122.C R118.1
N$24: LD121.C R117.1
N$25: LD120.C R116.1
N$26: LD119.C R129.1
N$27: D1.C Q1.3 R7.2 U1.6
N$28: LD118.C R128.1
N$29: LD117.C R127.1
N$30: LD116.C R126.1
N$31: LD115.C R125.1
N$32: LD114.C R124.1
N$33: LD113.C R123.1
N$34: LD112.C R122.1
N$35: LD111.C R121.1
N$36: LD110.C R120.1
N$37: LD109.C R119.1
N$38: C45.2 R51.2
N$39: C41.+ R58.1 U11.7
N$40: C40.+ R47.1 U11.5
N$41: R61.2 U12.2
N$42: R61.1 U12.3
N$43: C48.2 R56.2
N$44: C33.2 R39.2
N$45: C34.1 U11.1
N$46: C38.1 C52.1 R63.2 U12.1
N$47: LD1.A U2.21
N$48: C37.2 C38.2 R44.1 U12.4
N$49: R54.1 U12.7
N$50: C47.1 R54.2 U6.2
N$51: R19.2 U4.9 U4.10 U4.11 U4.12
N$52: LD2.A U2.19
N$54: R33.2 U4.36
N$55: R53.2 U12.6
N$56: D1.A R9.2 R10.1 S101.2
N$57: LD103.C R105.1
N$58: LD104.C R106.1
N$59: R34.2 U6.1
N$60: R29.2 U4.25
N$61: LD101.C R101.1
N$62: C50.2 R46.1
N$63: LD100.C R100.1
N$64: C49.2 R55.1
N$65: R43.2 R44.2 R48.1 U8.5
N$66: C22.2 R24.2 U4.18 X3.3 X4.2
N$68: CN8.2 CN10.3
N$70: R35.1 R36.2 R37.2 U7.5
N$71: Q2.B R10.2
N$72: R49.2 U10.1
N$73: LD108.C R113.1
N$77: LD3.A R27.1
N$78: R40.2 U9.6
P_ONOFF_CTRL: Q1.2 U3.54
PIO4: R1.2 TP1.P$1 U2.22
PS_MODE: U1.8 U3.55
RESET: C5.1 C6.2 CN4.5 R16.2 TP11.1 U3.30
RIGHTIN: C45.1 C49.1 CN11.2 Z1.1
RIGHTOUT: C40.- CN12.2 R59.1 Z3.1
RIGHTOUTSPKR: CN9.2 CN12.3
SCK: CN2.5 CN4.3 TP6.1 U3.20 U4.28 U6.7 U10.7
SCL: R18.2 TP8.1 U3.43
SDA: R17.2 TP10.1 U3.44
SDCARD_CS: CN2.2 U3.69
TMP+: CN10.4 R60.2 R63.1
TMP_CS: U3.28 U6.5
TMPOF_CS: U3.27 U8.4
UVLO: C1.2 R2.2 R6.1 U1.7
VIN: C1.1 C2.1 CN1.1 L1.P$2 Q1.4 R3.2 R6.2 S101.4 U1.5
XTAL1: C11.2 R22.2 R23.1 X1.3 X2.2
XTAL1R: R22.1 U3.34
XTAL2: C19.2 R23.2 U3.33 X1.1 X2.1